# EAGLE board CT_schematic (EAGLE 7.6.0)

Size 100 x 80 mm. Coordinates in mm from the lower left corner, seen from the top.
Outline: 0,0 100,0 100,80 0,80 0,0
Copper layers (1*16): Top 0.035mm / dielectric 1.5mm / Bottom 0.035mm
Design rules "default": minimum track width 10mil, minimum drill 24mil, track to track 8mil, track to pad 8mil, pad to pad 8mil, via to via 8mil, smd to smd 8mil, copper to edge 40mil, drill to drill 8mil, minimum pad ring 10mil, minimum via ring 8mil, stop-mask expansion 4mil, vias tented up to drill 0mil, thermal gap 10mil

## Footprints (pad centres in the part's own frame; a part is rotated, then mirrored left to right if it is on the bottom)
C0603 = smd 0.8 x 0.8: 1 -0.762,0; 2 0.762,0
C0402 = smd 0.5 x 0.5: 1 -0.508,0; 2 0.508,0
C1210 = smd 1.2 x 2.5: 1 -1.524,0; 2 1.524,0
C0805 = smd 1.2 x 1.3: 1 -1.016,0; 2 1.016,0
C1206 = smd 1.3 x 1.6: 1 -1.524,0; 2 1.524,0
L0603 = smd 0.8 x 0.8: 1 -0.762,0; 2 0.762,0
DR1040 = smd 1.6 x 3.2: 1 -4.458,0; 2 4.458,0
R0603 = smd 0.8 x 0.8: 1 -0.762,0; 2 0.762,0
TSSOP20 = smd 1.473 x 0.356: 1 -2.819,2.921; 2 -2.819,2.286; 3 -2.819,1.626; 4 -2.819,0.965; 5 -2.819,0.33; 6 -2.819,-0.33; 7 -2.819,-0.965; 8 -2.819,-1.626; 9 -2.819,-2.286; 10 -2.819,-2.921; 11 2.819,-2.921; 12 2.819,-2.286; 13 2.819,-1.626; 14 2.819,-0.965; 15 2.819,-0.33; 16 2.819,0.33; 17 2.819,0.965; 18 2.819,1.626; 19 2.819,2.286; 20 2.819,2.921
A2200-A = smd 1.5 x 0.8: 1 -4.85,6.35; 2 -4.85,5.08; 3 -4.85,3.81; 4 -4.85,2.54; 5 -4.85,1.27; 6 -4.85,0; 7 -4.85,-1.27; 8 -4.85,-2.54; 9 -4.85,-3.81; 10 -4.85,-5.08; 11 -4.85,-6.35; 12 4.85,-6.35; 13 4.85,-5.08; 14 4.85,-3.81; 15 4.85,-2.54; 16 4.85,-1.27; 17 4.85,0; 18 4.85,1.27; 19 4.85,2.54; 20 4.85,3.81; 21 4.85,5.08; 22 4.85,6.35 | smd 1.2 x 1.2: 23 -2,2; 24 -2,0; 25 -2,-2; 26 0,-2; 27 0,0; 28 0,2; 29 2,2; 30 2,0; 31 2,-2
COAXIAL_C = smd 1 x 1: 1 0,-1.5; 2 0,1.5 | smd 1.05 x 2.2: 3 -1.475,0; 4 1.475,0
QFN-28 = smd 0.813 x 0.305: 1 -2.451,1.5; 2 -2.451,1; 3 -2.451,0.5; 4 -2.451,0; 5 -2.451,-0.5; 6 -2.451,-1; 7 -2.451,-1.5; 15 2.451,-1.5; 16 2.451,-1; 17 2.451,-0.5; 18 2.451,0; 19 2.451,0.5; 20 2.451,1; 21 2.451,1.5 | smd 0.305 x 0.813: 8 -1.5,-2.451; 9 -1,-2.451; 10 -0.5,-2.451; 11 0,-2.451; 12 0.5,-2.451; 13 1,-2.451; 14 1.5,-2.451; 22 1.5,2.451; 23 1,2.451; 24 0.5,2.451; 25 0,2.451; 26 -0.5,2.451; 27 -1,2.451; 28 -1.5,2.451 | smd 3.607 x 3.607: 29 0,0
SJ-43515TS-SMT-TR = smd 2.2 x 3: 1 0.6,-7.4; 4 3.4,-7.4 | smd 3 x 3: 2 12.8,-7.4; 5 17,-3 | smd 2 x 3: 3 5.3,0; 6 2.5,0 | drill 1.8: P$7 4.5,-3.69; P$8 11.54,-3.69
ABLS-25.000MHZ-B2F-T = smd 5.6 x 2.8: 1 -3.81,0; 2 5.69,0
ABLS-12.288MHZ-B4-T = smd 5.6 x 2.8: 1 -3.81,0; 2 5.69,0
TSOT-23-5 = smd 1.3 x 0.62: 1 -1.31,0.95; 2 -1.31,0; 3 -1.31,-0.95; 4 1.31,-0.95; 5 1.31,0.95
DFN8_2X3MC = smd 0.813 x 0.305: 1 -1.398,0.75; 2 -1.398,0.25; 3 -1.398,-0.25; 4 -1.398,-0.75; 5 1.398,-0.75; 6 1.398,-0.25; 7 1.398,0.25; 8 1.398,0.75 | smd 1.753 x 1.549: 9 0,0
JST-2-SMD = smd 1 x 4.6: 1 -1,-3.7; 2 1,-3.7 | smd 1.6 x 3.4: NC1 -3.4,1.5; NC2 3.4,1.5
FCI_10118193-0001LF = smd 0.4 x 1.35: 1 -1.3,2.675; 2 -0.65,2.675; 3 0,2.675; 4 0.65,2.675; 5 1.3,2.675 | smd 1.6 x 1.4: 6 -3.2,2.45; 7 3.2,2.45 | smd 1.9 x 1.9: 8 -1.2,0; 9 1.2,0 | hole 0.5: -3.3,0; 3.3,0
SON-6 = smd 0.55 x 0.3: 1 -0.355,0.5 | smd 0.52 x 0.3: 2 -0.37,0; 3 -0.37,-0.5; 4 0.37,-0.5; 5 0.37,0; 6 0.37,0.5
SW_4-1437565-2 = smd 1.4 x 2.1: 1 -2.23,4.55; 2 -2.23,-4.55; 3 2.23,4.55; 4 2.23,-4.55
LGM67K-G1J2-24-Z = smd 0.8 x 1.4: A -2,0; C 0,0
NC7SZ125M5X = smd 1.3 x 0.7: 1 -1.3,0.95; 2 -1.3,0; 3 -1.3,-0.95; 4 1.3,-0.95; 5 1.3,0.95

## Placement (x,y rotation side)
C1  1e-07  [C0603]  -22.86,67.31 0 top  (outside the outline)
C2  4.7e-06  [C0603]  -19.05,67.31 0 top  (outside the outline)
C3  1e-08  [C0603]  -26.67,67.31 0 top  (outside the outline)
C4  1e-06  [C0603]  -30.48,67.31 0 top  (outside the outline)
C5  1e-11  [C0402]  -19.05,72.39 0 top  (outside the outline)
C6  1e-11  [C0402]  -22.86,72.39 0 top  (outside the outline)
C7  1e-07  [C0402]  -26.67,72.39 0 top  (outside the outline)
C8  2.2e-05  [C1210]  -57.15,48.26 0 top  (outside the outline)
C9  2.2e-05  [C1210]  -63.5,48.26 0 top  (outside the outline)
C10  1e-09  [C0402]  -30.48,72.39 0 top  (outside the outline)
C11  1e-09  [C0402]  -34.29,72.39 0 top  (outside the outline)
C12  1e-07  [C0402]  -38.1,72.39 0 top  (outside the outline)
C13  1e-07  [C0402]  -41.91,72.39 0 top  (outside the outline)
C14  1e-07  [C0402]  -45.72,72.39 0 top  (outside the outline)
C15  1e-07  [C0402]  -49.53,72.39 0 top  (outside the outline)
C16  1e-07  [C0402]  -53.34,72.39 0 top  (outside the outline)
C17  1e-05  [C0805]  -34.29,55.88 0 top  (outside the outline)
C18  1e-05  [C0805]  -39.37,55.88 0 top  (outside the outline)
C19  1e-05  [C0805]  -44.45,55.88 0 top  (outside the outline)
C20  1e-05  [C0805]  -49.53,55.88 0 top  (outside the outline)
C21  1e-05  [C0805]  -54.61,55.88 0 top  (outside the outline)
C22  2.2e-11  [C0402]  -73.66,67.31 0 top  (outside the outline)
C23  2.2e-11  [C0402]  -15.24,72.39 0 top  (outside the outline)
C24  1e-05  [C0805]  -59.69,55.88 0 top  (outside the outline)
C25  1e-05  [C0805]  -64.77,55.88 0 top  (outside the outline)
C26  1e-07  [C0402]  -57.15,72.39 0 top  (outside the outline)
C27  1e-05  [C1206]  -69.85,48.26 0 top  (outside the outline)
C28  1e-05  [C1206]  -16.51,55.88 0 top  (outside the outline)
C29  1e-08  [C0402]  -60.96,72.39 0 top  (outside the outline)
C30  1e-08  [C0402]  -64.77,72.39 0 top  (outside the outline)
F1  240.0  [L0603]  -34.29,67.31 0 top  (outside the outline)
I1  2.5e-06  [DR1040]  -66.04,25.4 0 top  (outside the outline)
R1  10000.0  [R0603]  -36.83,62.23 0 top  (outside the outline)
R2  1000.0  [R0603]  -38.1,67.31 0 top  (outside the outline)
R3  1600.5  [R0603]  -41.91,67.31 0 top  (outside the outline)
R4  4700.0  [R0603]  -45.72,67.31 0 top  (outside the outline)
R5  4700.0  [R0603]  -49.53,67.31 0 top  (outside the outline)
R6  2200.0  [R0603]  -53.34,67.31 0 top  (outside the outline)
R7  2200.0  [R0603]  -57.15,67.31 0 top  (outside the outline)
R8  10000.0  [R0603]  -41.91,62.23 0 top  (outside the outline)
R9  10000.0  [R0603]  -46.99,62.23 0 top  (outside the outline)
R10  47000.0  [R0603]  -52.07,62.23 0 top  (outside the outline)
R11  47000.0  [R0603]  -57.15,62.23 0 top  (outside the outline)
R12  47000.0  [R0603]  -62.23,62.23 0 top  (outside the outline)
R13  680.0  [R0603]  -60.96,67.31 0 top  (outside the outline)
R14  220000.0  [R0603]  -21.59,62.23 0 top  (outside the outline)
R15  1000000.0  [R0603]  -16.51,62.23 0 top  (outside the outline)
R16  10000.0  [R0603]  -67.31,62.23 0 top  (outside the outline)
R17  10000.0  [R0603]  -72.39,62.23 0 top  (outside the outline)
R18  9100.0  [R0603]  -64.77,67.31 0 top  (outside the outline)
R19  680000.0  [R0603]  -26.67,62.23 0 top  (outside the outline)
R20  120000.0  [R0603]  -31.75,62.23 0 top  (outside the outline)
R21  2000.0  [R0603]  -68.58,67.31 0 top  (outside the outline)
R22  10000.0  [R0603]  -15.24,67.31 0 top  (outside the outline)
U1  stm32f031f6p7  [TSSOP20]  -43.18,8.89 0 top  (outside the outline)
U2  A2200-A  [A2200-A]  -19.05,10.16 0 top  (outside the outline)
U3  73412-0114  [COAXIAL_C]  -48.26,38.1 0 top  (outside the outline)
U4  WM8731CLSEFL  [QFN-28]  -49.53,48.26 0 top  (outside the outline)
U5  SJ-43515TS-SMT-TR  [SJ-43515TS-SMT-TR]  -73.66,10.16 0 top  (outside the outline)
U6  SJ-43515TS-SMT-TR  [SJ-43515TS-SMT-TR]  -39.37,29.21 0 top  (outside the outline)
U7  ABLS-25.000MHZ-B2F-T  [ABLS-25.000MHZ-B2F-T]  -64.77,38.1 0 top  (outside the outline)
U8  ABLS-12.288MHZ-B4-T  [ABLS-12.288MHZ-B4-T]  -25.4,49.53 0 top  (outside the outline)
U9  ltc3406es5  [TSOT-23-5]  -69.85,55.88 0 top  (outside the outline)
U10  MCP73831T-2ACI/MC  [DFN8_2X3MC]  -15.24,76.2 0 top  (outside the outline)
U11  S2B-PH-SM4-TB(LF)(SN)  [JST-2-SMD]  -22.86,40.64 0 top  (outside the outline)
U12  10118193-0001LF  [FCI_10118193-0001LF]  -34.29,38.1 0 top  (outside the outline)
U13  TPS3895ADRYR  [SON-6]  -67.31,71.12 0 top  (outside the outline)
U14  4-1437565-2  [SW_4-1437565-2]  -55.88,25.4 0 top  (outside the outline)
U15  Q65110A2395  [LGM67K-G1J2-24-Z]  -36.83,48.26 0 top  (outside the outline)
U16  nc7sz125m5x  [NC7SZ125M5X]  -21.59,55.88 0 top  (outside the outline)
U17  nc7sz125m5x  [NC7SZ125M5X]  -27.94,55.88 0 top  (outside the outline)

## Library data of the parts
C1-C30 F1 I1 R1-R22 U1-U17 = circuit_tree

## Nets
CLK_CRYSTAL_U1_2: C5.1 U1.2 U7.1
CLK_CRYSTAL_U1_3: C6.1 U1.3 U7.2
CLK_CRYSTAL_U4_1: C22.1 U4.1 U8.1
CLK_CRYSTAL_U4_2: C23.1 U4.2 U8.2
GND: C1.2 C2.2 C3.2 C4.2 C5.2 C6.2 C7.2 C11.2 C12.2 C13.2 C14.2 C15.2 C16.2 C17.2 C18.2 C19.2 C20.2 C21.2 C22.2 C23.2 C24.2 C25.1 C25.2 C26.2 C27.2 C28.2 C29.2 C30.2 R2.2 R8.2 R10.2 R11.2 R12.2 R14.2 R18.2 R20.2 R21.2 U1.15 U2.7 U2.8 U2.23 U2.24 U2.25 U2.26 U2.27 U2.28 U2.29 U2.30 U2.31 U4.4 U4.15 U4.19 U4.25 U4.26 U4.29 U5.1 U6.1 U9.2 U10.6 U10.9 U11.2 U12.5 U12.6 U12.7 U12.8 U12.9 U13.2 U15.C U16.1 U16.3 U17.1 U17.3
INPUT_USBPOWER_5V: C27.1 R22.2 U10.1 U10.2 U12.1
NET_U1_1: R8.1 U1.1
NET_U1_4: R5.1 U1.4 U17.4
NET_U1_5: C3.1 C4.1 F1.1 U1.5
NET_U1_17: R6.1 U1.17 U2.15
NET_U1_18: R7.1 U1.18 U2.16
NET_U1_19: R3.1 U1.19 U15.A
NET_U1_20: R1.1 U1.20 U14.3 U14.4
NET_U2_2: R9.2 U2.2
NET_U2_6: U2.6
NET_U2_17: R9.1 U2.17
NET_U2_19: U2.19
NET_U2_22: R4.1 U2.22 U16.4
NET_U3_1: U2.11 U3.1
NET_U3_2: U2.10 U3.2 U3.3 U3.4
NET_U4_9: U4.9
NET_U4_20: C16.1 C21.1 U4.20
NET_U5_2: C9.1 R11.1 U5.2
NET_U5_5: C8.1 R10.1 U5.5
NET_U5_13: C8.2
NET_U5_14: C9.2
NET_U6_5: C10.1 C11.1 R12.1 R13.1 U6.5
NET_U6_21: R13.2
NET_U6_22: C10.2
NET_U9_1: U9.1
NET_U9_3: I1.1 U9.3
NET_U9_5: R14.1 R15.1 U9.5
NET_U9_ATNET_3: I1.2 R15.2
NET_U10_5: R22.1 U10.5
NET_U10_8: R21.1 U10.8
NET_U13_1: R17.1 R18.1 U13.1
NET_U13_3: R19.2 R20.1 U13.3
NET_U13_4: R16.1 U13.4 U16.2 U17.2
NET_U14_1: R2.1 U14.1 U14.2
PROC_I2S1_CK: U1.11 U4.7
PROC_I2S1_SD: U1.13 U4.8
PROC_I2S1_WS: U1.10 U4.9 U4.11
VCC_S1_3V7: C24.1 C28.1 U9.4 U10.3 U10.4 U11.1
VCC_TIER1_3V3: C1.1 C2.1 C7.1 C12.1 C13.1 C14.1 C15.1 C17.1 C18.1 C19.1 C20.1 C25.2 C26.1 C29.1 C30.1 F1.2 I1.2 R1.2 R3.2 R4.2 R5.2 R6.2 R7.2 R15.2 R16.2 R17.2 R19.1 U1.16 U2.20 U4.3 U4.5 U4.12 U4.18 U13.6 U16.5 U17.5

## Tracks (layer width: path | path; a pad name or v marks a point on that pad's centre or on a via)
CLK_CRYSTAL_U1_2  (2 unrouted)
CLK_CRYSTAL_U1_3  (2 unrouted)
CLK_CRYSTAL_U4_1  (2 unrouted)
CLK_CRYSTAL_U4_2  (2 unrouted)
GND  (71 unrouted)
INPUT_USBPOWER_5V  (4 unrouted)
NET_U1_1  (1 unrouted)
NET_U1_4  (2 unrouted)
NET_U1_5  (3 unrouted)
NET_U1_17  (2 unrouted)
NET_U1_18  (2 unrouted)
NET_U1_19  (2 unrouted)
NET_U1_20  (3 unrouted)
NET_U2_2  (1 unrouted)
NET_U2_17  (1 unrouted)
NET_U2_22  (2 unrouted)
NET_U3_1  (1 unrouted)
NET_U3_2  (3 unrouted)
NET_U4_20  (2 unrouted)
NET_U5_2  (2 unrouted)
NET_U5_5  (2 unrouted)
NET_U6_5  (4 unrouted)
NET_U9_3  (1 unrouted)
NET_U9_5  (2 unrouted)
NET_U9_ATNET_3  (1 unrouted)
NET_U10_5  (1 unrouted)
NET_U10_8  (1 unrouted)
NET_U13_1  (2 unrouted)
NET_U13_3  (2 unrouted)
NET_U13_4  (3 unrouted)
NET_U14_1  (2 unrouted)
PROC_I2S1_CK  (1 unrouted)
PROC_I2S1_SD  (1 unrouted)
PROC_I2S1_WS  (2 unrouted)
VCC_S1_3V7  (5 unrouted)
VCC_TIER1_3V3  (35 unrouted)